# Altium PCB MainBoard_System_pcb.PcbDoc (part 1 of 3)
Units mm, origin at the board's own origin, x right, y up, seen from the top; angles counter-clockwise.
Board outline 57.35 x 57.35 mm, 2 copper layers (Top Layer, Bottom Layer); 82 components, 64 nets, 322 pads, 173 vias.
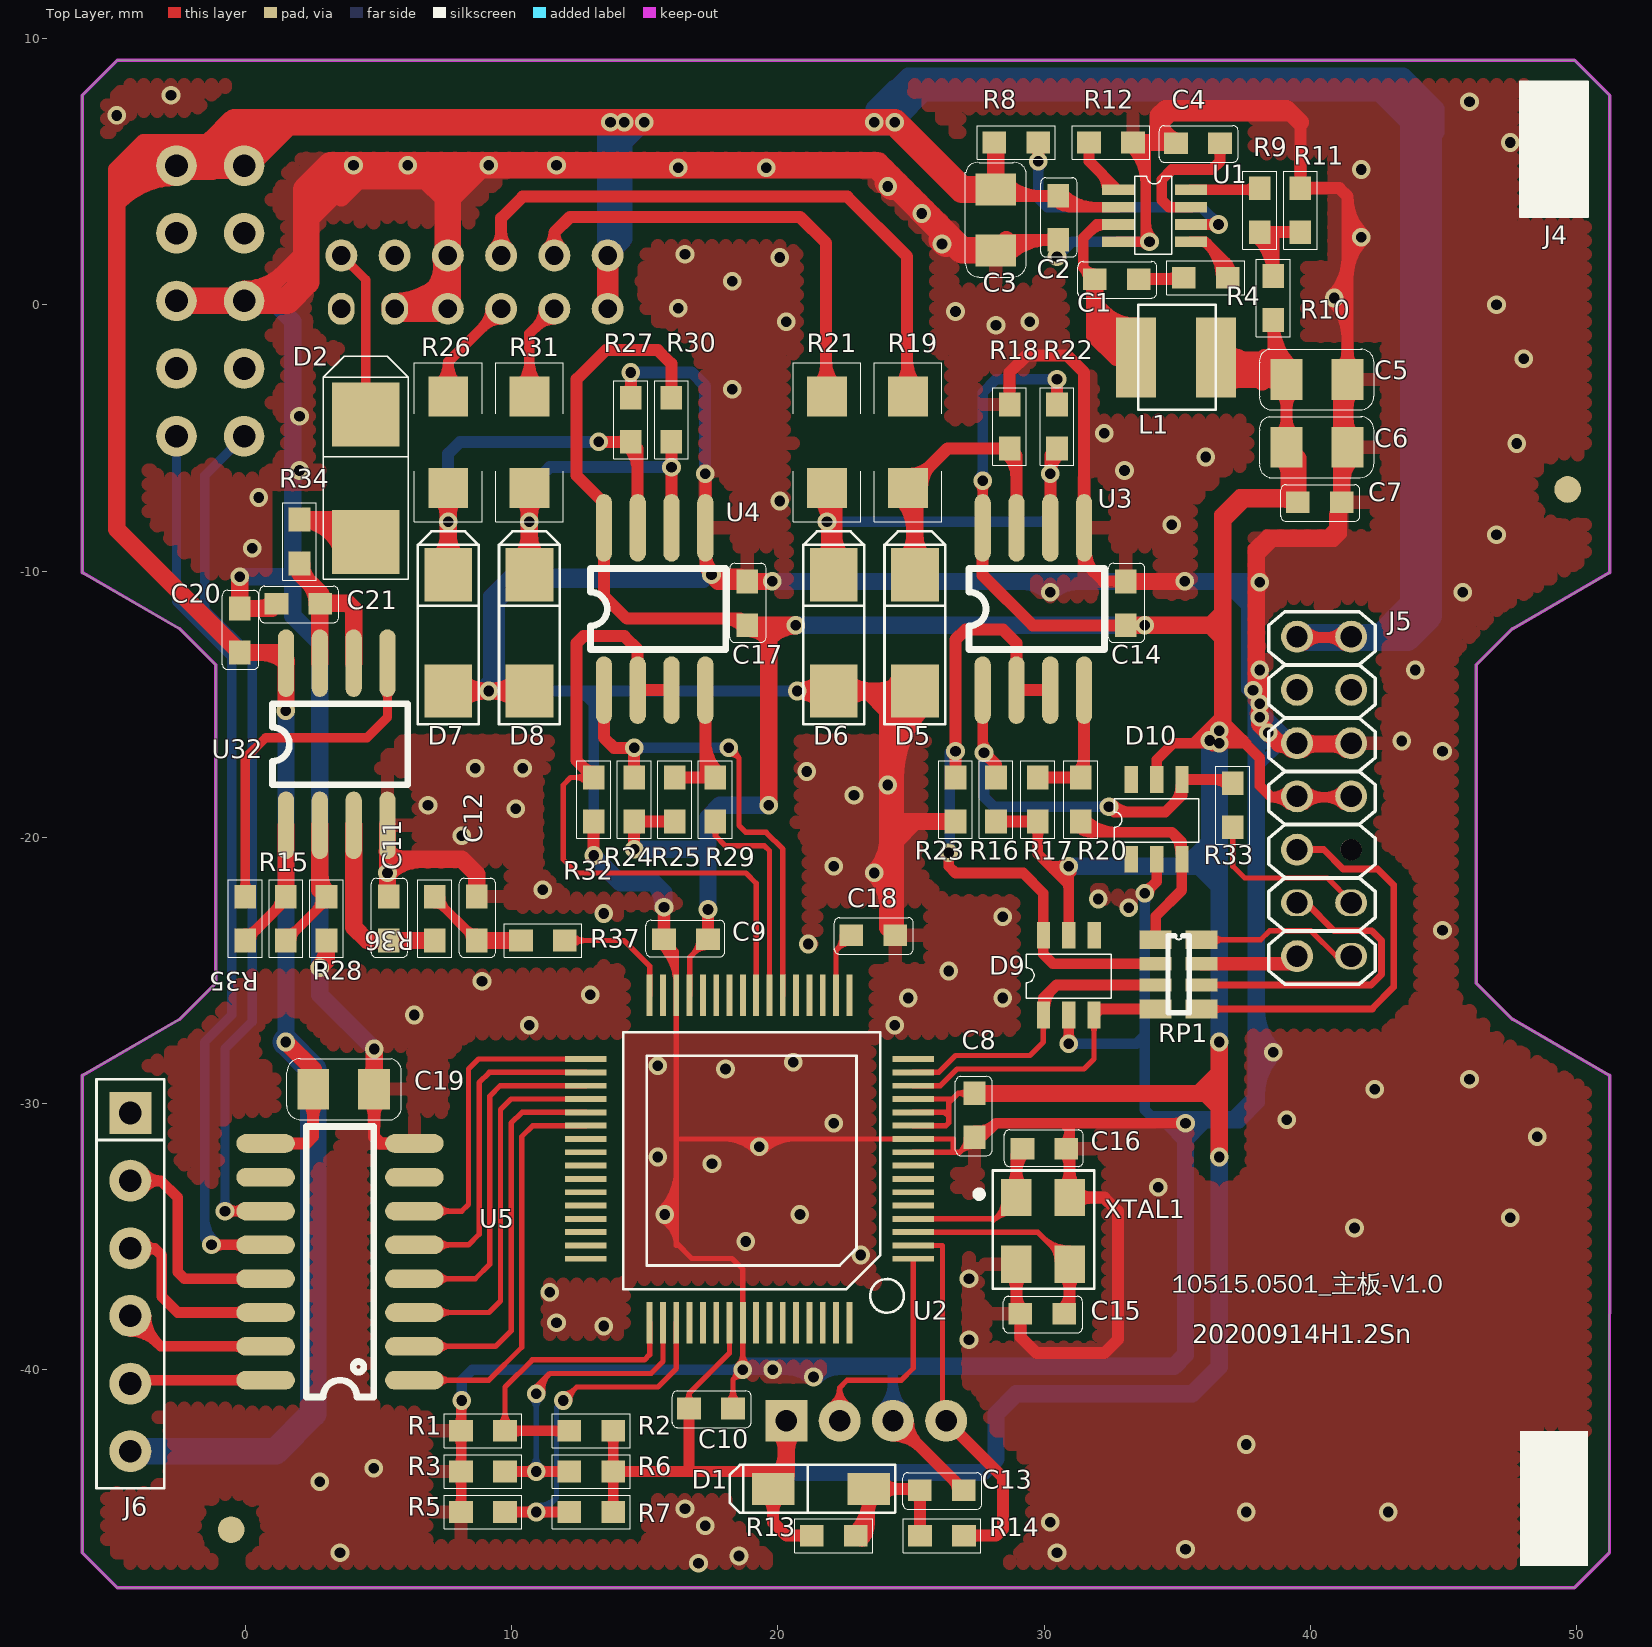
[diagram p0: Top Layer view]
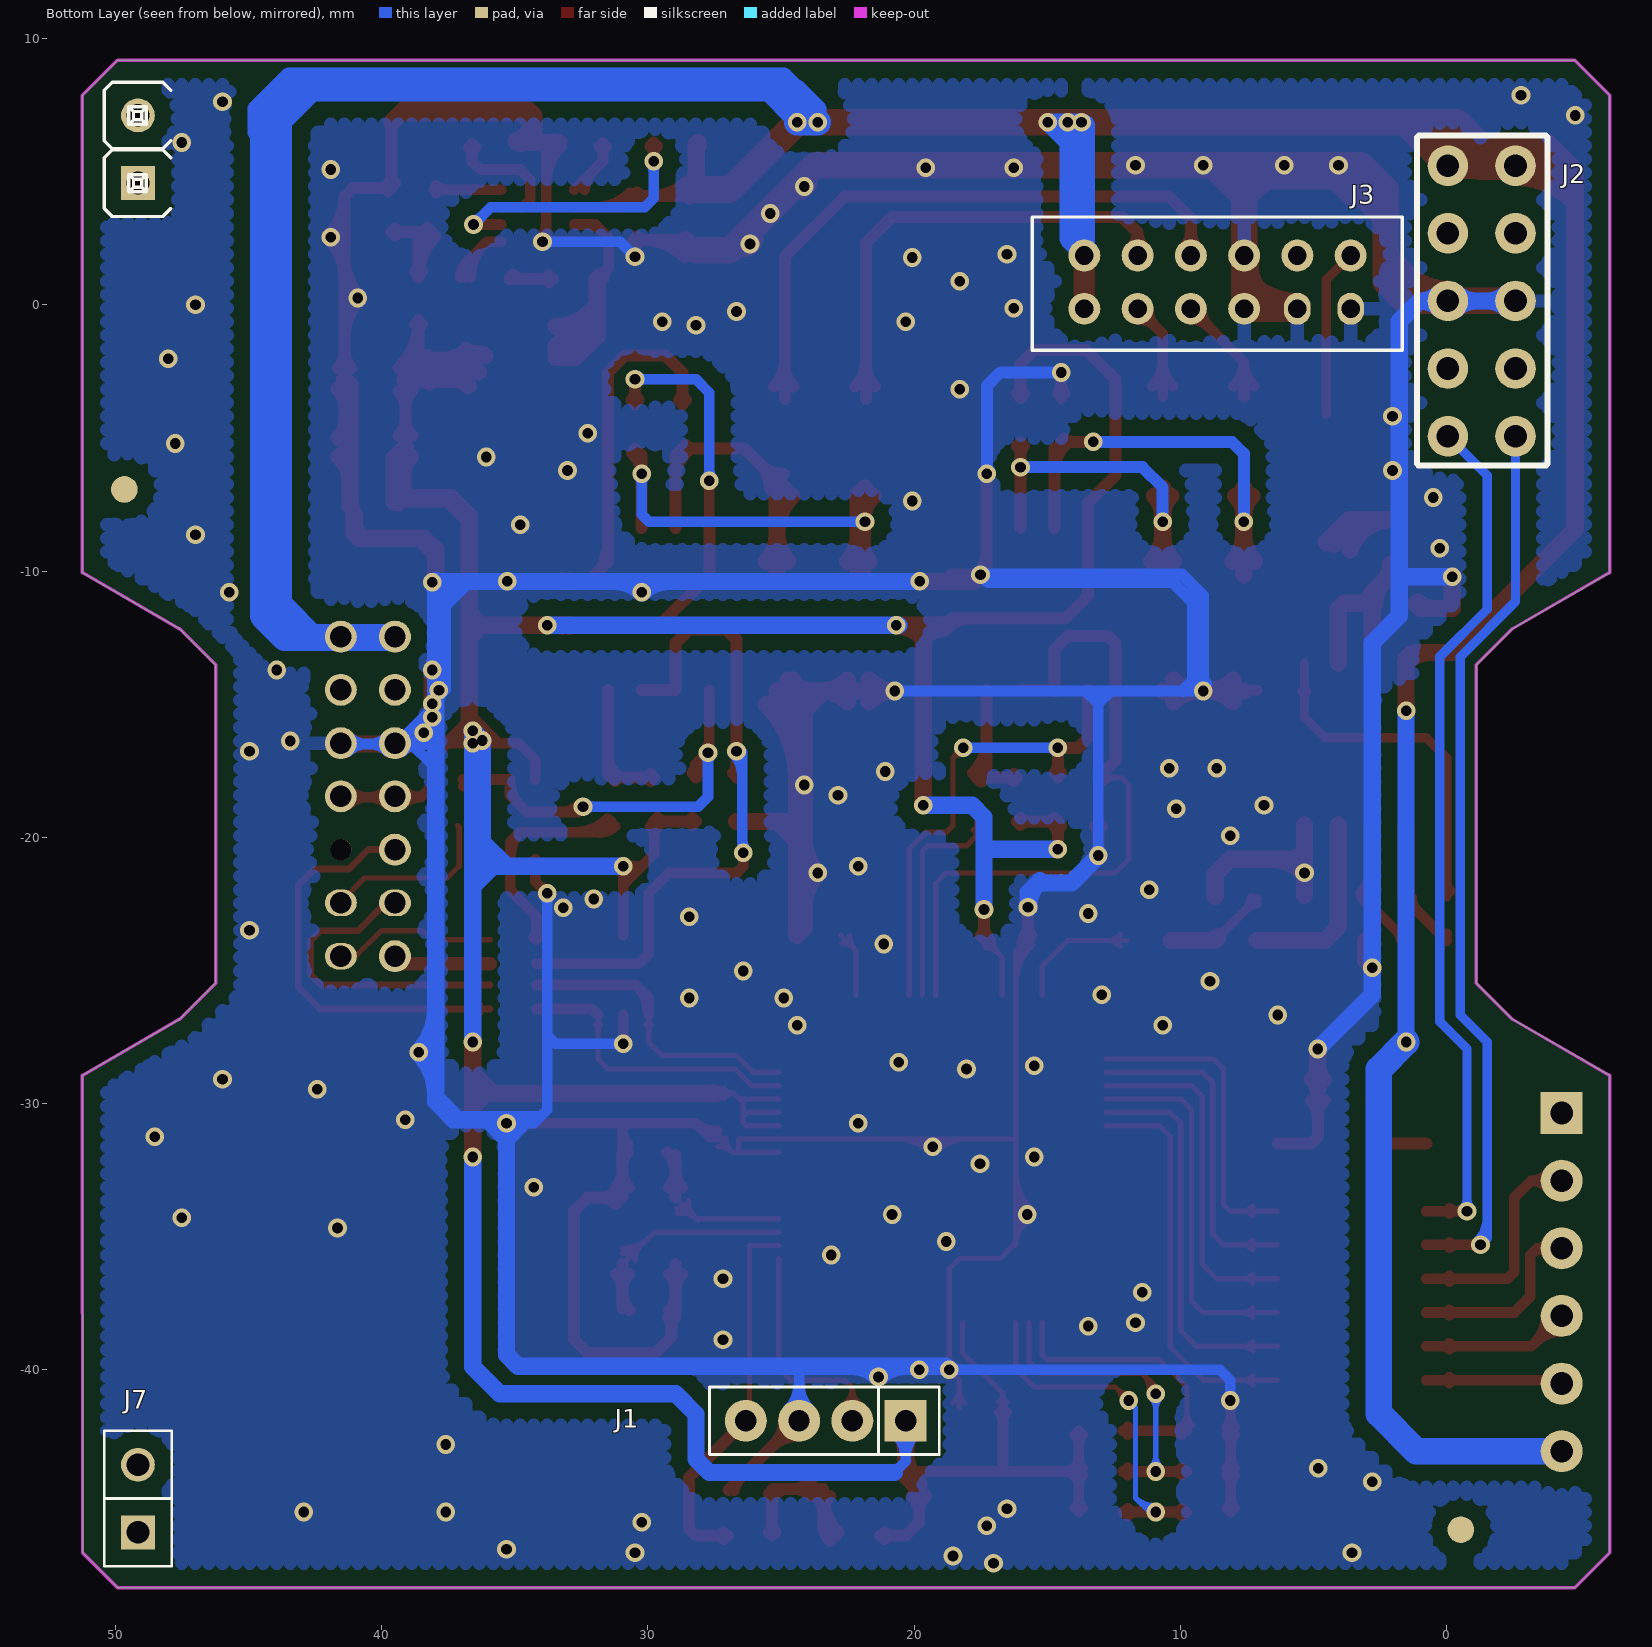
[diagram p1: Bottom Layer view, seen from below]
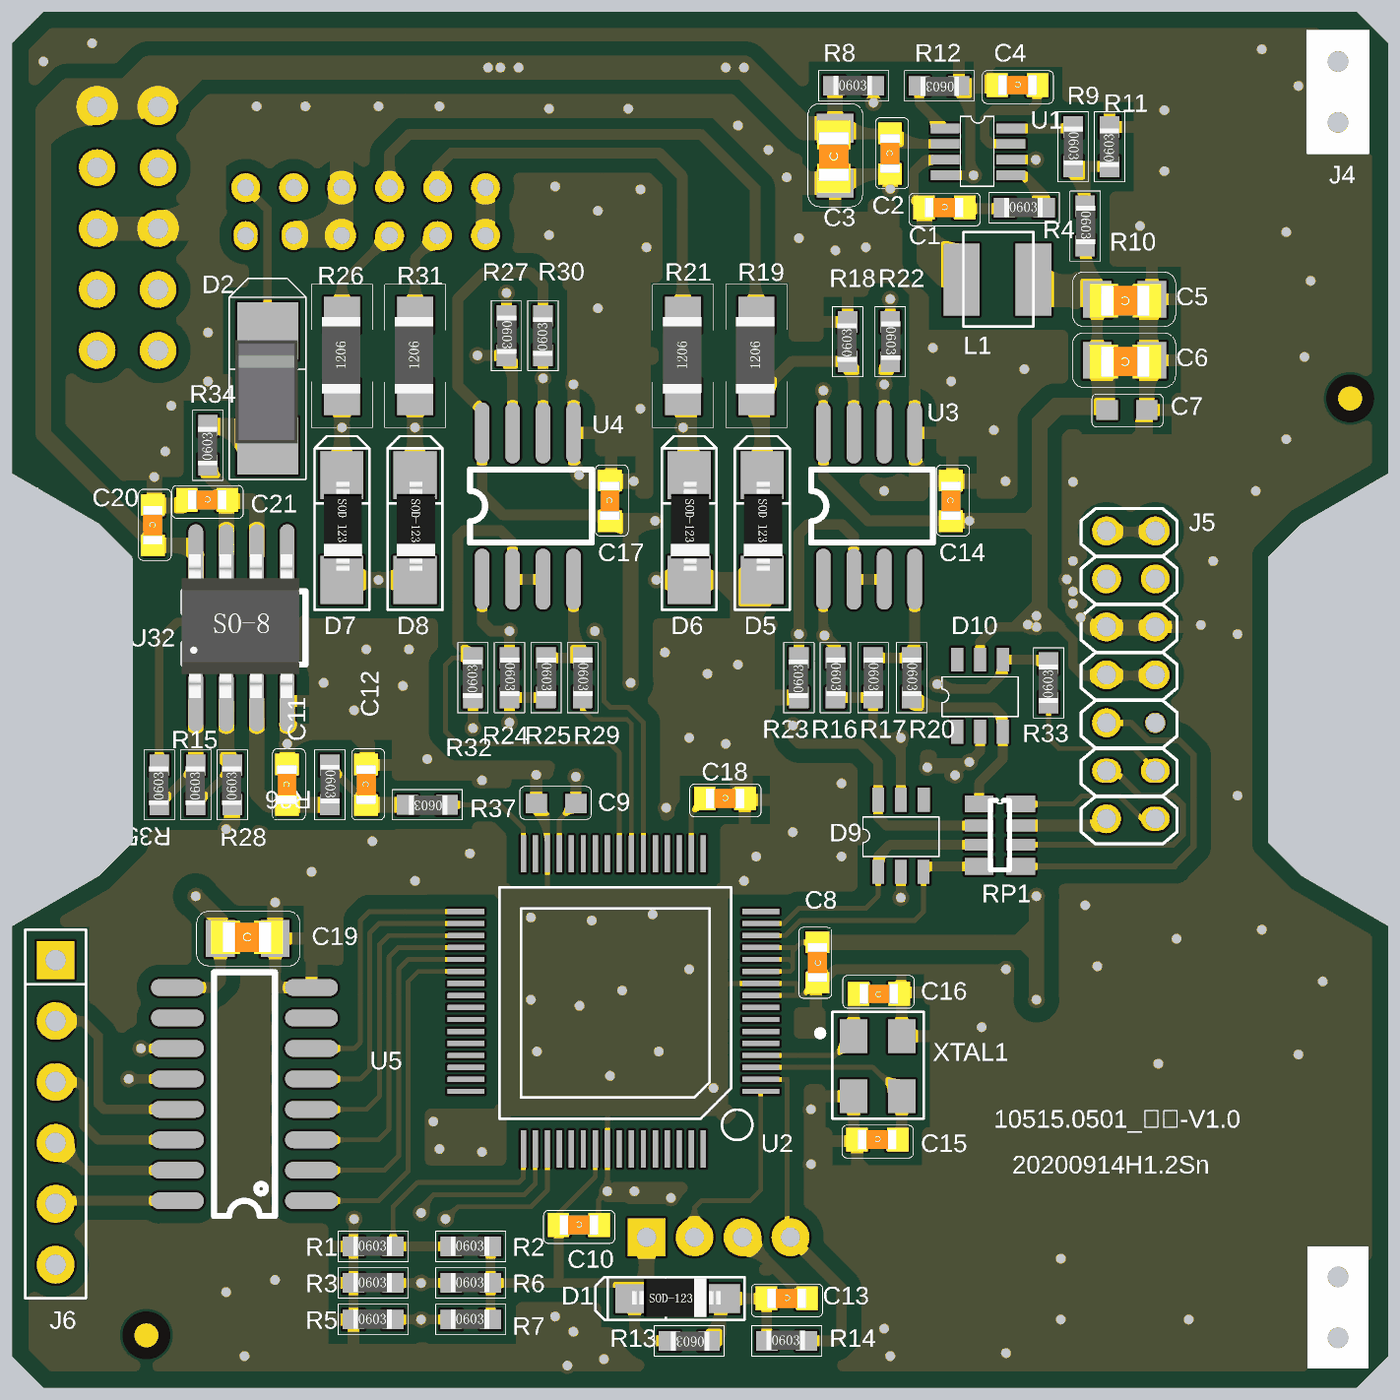
[diagram p4: 3D render of the assembled board from above, using the file's embedded part models]

## Layer stack, top to bottom
Top Layer: signal copper 0.0356
Dielectric: dielectric 0.32, FR-4, Dk 4.8
Bottom Layer: signal copper 0.0356

## Board outline
-6.118,-46.874 -4.817,-48.174 49.919,-48.174 49.919,-48.172 51.231,-46.859 51.234,-28.939 47.584,-26.831 46.234,-25.481 46.234,-13.516 47.584,-12.166 51.234,-10.059 51.234,7.862 49.919,9.177 -4.817,9.177 -6.118,7.877 -6.118,-10.059 -2.468,-12.166 -1.118,-13.516 -1.118,-25.481 -2.468,-26.831 -6.118,-28.939

## Design rules (kind name [scope] priority, off if disabled: settings)
Clearance Clearance_1 [InPolygon] p1: gap=0.6
Clearance [All] p2: gap=0.2
HoleSize [All] p1 off: absolutevalues=TRUE maxlimit=2.54 minlimit=0.025 maxpercent=80.000 minpercent=20.000
HoleToHoleClearance [All] p1 off: gap=0.254 allowstackedmicrovias=TRUE
LayerPairs [All] p1 off: enforce=TRUE
MinimumSolderMaskSliver [All] p1 off: minsoldermaskwidth=0.254
NetAntennae [All] p1 off: netantennaetolerance=0
PolygonConnect PolygonConnect_1 [IsVia] p1: connectstyle=Direct reliefconductorwidth=0.254 reliefentries=4 polygonreliefangle="90 Angle"
PolygonConnect [All] p2: connectstyle=Relief reliefconductorwidth=0.5 reliefentries=4 polygonreliefangle="90 Angle"
RoutingVias [All] p1: holewidth=0.4 width=0.7 viastyle="Through Hole" minholewidth=0.4 minwidth=0.7 maxholewidth=0.7 maxwidth=1.2
SilkToSilkClearance [All] p1 off: silktosilkclearance=0.254
SilkscreenOverComponentPads [IsPad] p1 off: minsilkscreentomaskgap=0.254
SolderMaskExpansion [All] p1: expansion=0.102
Width [All] p1: maxlimit=1 minlimit=0.2 preferedwidth=0.65
21 further rules are at their usual default settings.

## Components (designator, comment, footprint, x,y, rotation, side; value= is the part's Value field where it differs from the comment)
C1 "0.1uF/0603" CAP/SMT/0603C 33.528,1.016 r180 top
C2 "0.1uF/0603" CAP/SMT/0603C 30.48,4.064 r270 top
C3 "22uF/0805" CAP/SMT/0805C 28.194,2.032 r90 top
C4 "1nF/0603" CAP/SMT/0603C 36.576,6.119 r180 top
C5 "22uF/0805" CAP/SMT/0805C 41.402,-2.794 r180 top
C6 "22uF/0805" CAP/SMT/0805C 41.402,-5.334 r180 top
C7 "0.1uF/0603" CAP/SMT/0603C 41.148,-7.366 r180 top
C8 "0.1uF/0603" CAP/SMT/0603C 27.432,-31.242 r90 top
C9 "0.1uF/0603" CAP/SMT/0603C 15.748,-23.876 r0 top
C10 "1uF/0603" CAP/SMT/0603C 18.288,-41.402 r180 top
C11 "10uF/0603" CAP/SMT/0603C 5.334,-22.248 r270 top
C12 "10uF/0603" CAP/SMT/0603C 8.636,-22.248 r270 top
C13 "0.1uF/0603" CAP/SMT/0603C 26.954,-44.466 r180 top
C14 "0.1uF/0603" CAP/SMT/0603C 33.02,-10.414 r270 top
C15 "20pF/0603" CAP/SMT/0603C 30.734,-37.846 r180 top
C16 "20pF/0603" CAP/SMT/0603C 29.21,-31.75 r0 top
C17 "0.1uF/0603" CAP/SMT/0603C 18.796,-10.414 r270 top
C18 "0.1uF/0603" CAP/SMT/0603C 24.384,-23.622 r180 top
C19 "22uF/0805" CAP/SMT/0805C 2.54,-29.464 r0 top
C20 "0.1uF/0603" CAP/SMT/0603C -0.254,-11.43 r270 top
C21 "0.1uF/0603" CAP/SMT/0603C 2.794,-11.176 r180 top
D1 "1N4148/SOD-123" D/SMT/SOD-123 21.62,-44.466 r0 top
D2 "1N5819" D/SMT/DO-214AC 4.572,-8.89 r270 top
D5 "SMF6.5CA/SOD-123" D/SMT/SOD123 25.146,-9.906 r270 top
D6 "SMF6.5CA/SOD-123" D/SMT/SOD123 22.098,-9.906 r270 top
D7 "SMF6.5CA/SOD-123" D/SMT/SOD123 7.62,-9.906 r270 top
D8 "SMF6.5CA/SOD-123" D/SMT/SOD123 10.668,-9.906 r270 top
D9 "SR05-4B/SOT-363" TSOT-6L 29.972,-26.67 r90 top
D10 "SR05-4B/SOT-363" TSOT-6L 33.274,-20.828 r90 top
J1 "CON/DIP/1X4PIN/2MM" CON/DIP/1×4PIN/2.0MM 20.32,-41.91 r0 bottom
J2 "CON/2X5PIN" CON/DIP/2X5PIN/2.54MM -0.046,5.226 r180 bottom
J3 "CON/DIP/2X6PIN_WAFER" CON/DIP/2X6PIN/2.0MM 3.607,1.851 r270 bottom
J4 "1X2PIN_2.54MM" CON/DIP/1×2PIN/2.54MM 49.149,4.572 r180 top
J5 "CON/2X7PIN" CON/DIP/2X7PIN/2.0MM 39.497,-12.461 r0 top
J6 "1X6PIN" CON/DIP/1×6PIN/2.0MM -4.318,-30.353 r270 top
J7 "1X2PIN_2.54MM" CON/DIP/1×2PIN/2.54MM 49.149,-46.101 r0 bottom
L1 "6.8UH" L/SMT/SWPA3015S150MT 33.274,-2.032 r0 top
R1 "NC" 0603R 8.928,-42.291 r0 top
R2 "NC" 0603R 12.992,-42.291 r0 top
R3 "NC" 0603R 8.928,-43.815 r0 top
R4 "20R/0603" 0603R 36.068,1.016 r0 top
R5 "NC" 0603R 8.928,-45.339 r0 top
R6 "NC" 0603R 12.992,-43.815 r0 top
R7 "NC" 0603R 12.992,-45.339 r0 top
R8 "100K/0603" 0603R 28.956,6.096 r0 top
R9 "33K/0603" 0603R 38.1,3.556 r270 top
R10 "39K/0603" 0603R 38.608,0.254 r270 top
R11 "12K/0603" 0603R 39.624,3.556 r90 top
R12 "10K/0603" 0603R 32.512,6.096 r180 top
R13 "10K/0603" 0603R 22.098,-46.228 r180 top
R14 "430R/0603" 0603R 26.162,-46.228 r0 top
R15 "56K/0603" 0603R 1.524,-23.05 r90 top
R16 "10K/0603" 0603R 28.194,-18.58 r270 top
R17 "10K/0603" 0603R 29.76,-18.58 r270 top
R18 "10K/0603" 0603R 28.702,-4.572 r90 top
R19 "10R/5%/1206" 1206R 24.892,-6.858 r90 top
R20 "100R/0603" 0603R 31.369,-18.58 r270 top
R21 "10R/5%/1206" 1206R 21.844,-6.858 r90 top
R22 "10K/0603" 0603R 30.48,-4.572 r270 top
R23 "10K/0603" 0603R 26.67,-18.58 r90 top
R24 "10K/0603" 0603R 14.605,-18.58 r270 top
R25 "10K/0603" 0603R 16.129,-18.58 r270 top
R26 "10R/5%/1206" 1206R 7.62,-6.858 r90 top
R27 "10K/0603" 0603R 14.478,-4.318 r270 top
R28 "27K/0603" 0603R 3.048,-23.05 r90 top
R29 "100R/0603" 0603R 17.653,-18.58 r270 top
R30 "10K/0603" 0603R 16.002,-4.318 r90 top
R31 "10R/5%/1206" 1206R 10.668,-6.858 r90 top
R32 "10K/0603" 0603R 13.081,-18.58 r90 top
R33 "10R/0603" 0603R 37.084,-18.796 r90 top
R34 "1K/0603" 0603R 2.032,-8.89 r90 top
R35 "10R/0603" 0603R 0,-23.05 r90 top
R36 "1K/0603" 0603R 7.112,-23.05 r270 top
R37 "1K/0603" 0603R 11.176,-23.876 r180 top
RP1 "10R/0603/1/8W/±5%" 0603R*4 35.052,-25.146 r270 top
U1 "MPS2314/SOT23-8" TSOT-8 32.766,4.318 r0 top
U2 "STM8L052R8T6/LQFP64" LQFP64 24.892,-35.814 r180 top
U3 "MS1585" SOP-8 27.686,-14.478 r90 top
U4 "MS1585" SOP-8 13.462,-14.478 r90 top
U5 "ULN2003ADR" SOP-16 6.35,-40.386 r180 top
U32 "SGM358YS" SOIC-8 1.524,-19.558 r90 top
XTAL1 "OSC 12MHZ" OSC/SMT/12M 28.956,-33.528 r0 top

## Footprints (in the part's own frame and the unit in brackets; to place one, negate y for a bottom-side part, rotate by r counter-clockwise, add the part's x,y. Pads: shape width x height; smd on the part's side, far side on the other; paste and mask are expansions set on the pad)
0603R [mil]
  rect 35x32 smd: 1(-32.5,0) 2(32.5,0)
  silkscreen extent -58,-25 58,25, body extent -33,-15 30,16, height 18
0603R*4 [mm]
  rect 0.7x1.2 smd: 1(-1.3,-0.865) 4(1.3,-0.865) 5(1.3,0.865) 8(-1.3,0.865)
  rect 0.5x1.2 smd: 2(-0.4,-0.865) 3(0.4,-0.865) 6(0.4,0.865) 7(-0.4,0.865)
  silkscreen extent -1.45,-0.4 1.45,0.4
1206R [mm]
  rect 1.5x1.5 smd: 1(-0.02,0) 2(3.409,0)
  silkscreen extent -1.29,-1.27 4.68,1.27, body extent 0.13,-0.76 3.33,0.84, height 0.6
CAP/SMT/0603C [mil]
  rect 35x32 smd: 1(-1,1.97) 2(64,1.97)
  silkscreen extent -28,-24 89,30, body extent -20,-20 82,19, height 35
CAP/SMT/0805C [mm]
  rect 1.2x1.524 smd: 1(0.01,0.01) 2(2.296,0.01)
  silkscreen extent -0.99,-1.13 3.32,1.15, body extent -0.38,-0.64 2.62,0.76, height 0.93
CON/DIP/1×2PIN/2.54MM [mm]
  rect 1.27x1.27 hole 0.85: 1(0,0)
  round 1.27 hole 0.85: 2(0,-2.54)
  silkscreen extent -1.27,-3.81 1.27,1.27
CON/DIP/1×4PIN/2.0MM [mil]
  rect 62x62 hole 31.5 mask+4: 1(0,0)
  round 62 hole 31.5 mask+4: 2(78.74,0) 3(157.48,0) 4(236.22,0)
  silkscreen extent -50,-50 290,50
CON/DIP/1×6PIN/2.0MM [mil]
  rect 62x62 hole 33.46 mask+4: 1(0,0)
  round 62 hole 33.46 mask+4: 2(100,0) 3(200,0) 4(300,0) 5(400,0) 6(500,0)
  silkscreen extent -50,-50 555,50
CON/DIP/2X5PIN/2.54MM [mil]
  round 60 hole 33.46: 1(0,0) 2(100,0) 3(0,-100) 4(100,-100) 5(0,-200) 6(100,-200) 7(0,-300) 8(100,-300) 9(0,-400) 10(100,-400)
  silkscreen extent -48,-446 149,47
CON/DIP/2X6PIN/2.0MM [mm]
  round 1.2 hole 0.7: 1(0,0) 3(0,-2) 5(0,-4) 6(2,-4) 7(0,-6) 8(2,-6) 9(0,-8) 10(2,-8) 11(0,-10) 12(2,-10)
  oval 1.2x1 hole 0.7: 2(2,0) 4(2,-2)
  silkscreen extent -1.45,-11.96 3.55,1.94
CON/DIP/2X7PIN/2.0MM [mm]
  round 1.2 hole 0.8: 1(0,0) 2(2.032,0) 3(0,-2) 4(2.032,-2) 5(0,-4) 6(2.032,-4) 7(0,-6) 8(2.032,-6) 9(0,-8) 13(0,-12)
  round 0.8 hole 0.8: 10(2.032,-8)
  oval 1.2x1 hole 0.8: 11(0,-10) 12(2.032,-10) 14(2.032,-12)
  silkscreen extent -1.06,-13.05 2.94,0.93
D/SMT/DO-214AC [mil]
  rect 94.49x100 smd: 1(-187.98,-2) 2(1,-2)
  silkscreen extent -274,-65 56,61, body extent -190,-55 15,47, height 40
D/SMT/SOD123 [mm]
  rect 2x1.8 smd: 1(0.229,0) 2(4.597,0)
  silkscreen extent -1.4,-1.14 5.84,1.14, body extent 0.51,-0.76 4.21,0.84, height 1.2
D/SMT/SOD-123 [mm]
  rect 1.6x1.2 smd: 1(-1.8,0) 2(1.8,0)
  silkscreen extent -3.43,-0.9 2.78,0.9, body extent -1.91,-0.76 1.79,0.84, height 1.2
L/SMT/SWPA3015S150MT [mm]
  rect 1.5x3 smd: 1(0.175,0.051) 2(3.175,0.051)
  silkscreen extent 0.25,-1.91 3.17,2.03
LQFP64 [mm]
  rect 1.55x0.22 smd: 1(-0.193,0.013) 2(-0.193,-0.487) 3(-0.193,-0.987) 4(-0.193,-1.487) 5(-0.193,-1.987) 6(-0.193,-2.487) 7(-0.193,-2.987) 8(-0.193,-3.487) 9(-0.193,-3.987) 10(-0.193,-4.487) 11(-0.193,-4.987) 12(-0.193,-5.487) 13(-0.193,-5.987) 14(-0.193,-6.487) 15(-0.193,-6.987) 16(-0.193,-7.487) 33(12.107,-7.487) 34(12.107,-6.987) 35(12.107,-6.487) 36(12.107,-5.987) 37(12.107,-5.487) 38(12.107,-4.987) 39(12.107,-4.487) 40(12.107,-3.987) 41(12.107,-3.487) 42(12.107,-2.987) 43(12.107,-2.487) 44(12.107,-1.987) 45(12.107,-1.487) 46(12.107,-0.987) 47(12.107,-0.487) 48(12.107,0.013)
  rect 0.22x1.55 smd: 17(2.207,-9.887) 18(2.707,-9.887) 19(3.207,-9.887) 20(3.707,-9.887) 21(4.207,-9.887) 22(4.707,-9.887) 23(5.207,-9.887) 24(5.707,-9.887) 25(6.207,-9.887) 26(6.707,-9.887) 27(7.207,-9.887) 28(7.707,-9.887) 29(8.207,-9.887) 30(8.707,-9.887) 31(9.207,-9.887) 32(9.707,-9.887) 49(9.707,2.413) 50(9.207,2.413) 51(8.707,2.413) 52(8.207,2.413) 53(7.707,2.413) 54(7.207,2.413) 55(6.707,2.413) 56(6.207,2.413) 57(5.707,2.413) 58(5.207,2.413) 59(4.707,2.413) 60(4.207,2.413) 61(3.707,2.413) 62(3.207,2.413) 63(2.707,2.413) 64(2.207,2.413)
  silkscreen extent 0.16,-8.5 10.7,2.04
OSC/SMT/12M [mm]
  rect 1.15x1.4 smd: 1(0,0) 2(0,-2.5) 3(2,-2.5) 4(2,0)
  silkscreen extent -1.52,-3.43 2.92,1.02
SOIC-8 [mil]
  oval 100x24 smd: 1(0.27,-0.17) 2(0.27,-50.17) 3(0.27,-100.17) 4(0.27,-150.17) 5(240.27,-150.17) 6(240.27,-100.17) 7(240.27,-50.17) 8(240.27,-0.17)
  silkscreen extent 60,-180 180,20, body extent 5,-170 241,23, height 67
SOP-8 [mil]
  oval 100x24 smd: 1(0.27,-0.17) 2(0.27,-50.17) 3(0.27,-100.17) 4(0.27,-150.17) 5(240.27,-150.17) 6(240.27,-100.17) 7(240.27,-50.17) 8(240.27,-0.17)
  silkscreen extent 60,-180 180,20
SOP-16 [mm]
  oval 2.2x0.7 smd: 1(0,0) 2(0,-1.27) 3(0,-2.54) 4(0,-3.81) 5(0,-5.08) 6(0,-6.35) 7(0,-7.62) 8(0,-8.89) 9(5.588,-8.89) 10(5.588,-7.62) 11(5.588,-6.35) 12(5.588,-5.08) 13(5.588,-3.81) 14(5.588,-2.54) 15(5.588,-1.27) 16(5.588,0)
  silkscreen extent 1.52,-9.53 4.06,0.64
TSOT-6L [mm]
  rect 1x0.5 smd: 1(0,0) 2(0,-0.95) 3(0,-1.9) 4(3,-1.905) 5(3,-0.95) 6(3,0)
  silkscreen extent 0.64,-2.54 2.29,0.64
TSOT-8 [mm]
  rect 1.2x0.4 smd: 1(0,0) 2(0,-0.65) 3(0,-1.3) 4(0,-1.95) 5(2.746,-1.95) 6(2.746,-1.3) 7(2.746,-0.65) 8(2.746,0)
  silkscreen extent 0.64,-2.41 2.03,0.51

## Part data
C1 C2 C4 C7 C8 C9 C10 C11 C12 C13 C14 C15 C16 C17 C18 C20 C21: library part CAP/CAP/SMT/0603C
C3 C5 C6 C19: library part CAP/CAP/SMT/0805C
D1: library part D/D/SMT/1N4148/SOD-123, "VR=75V T(-65-175)P(0.5W)VF=0.6V"
D2: library part D/D/SMT/1N5819/DO-214
D5 D6 D7 D8: library part D/TVS/SMT/SMF13CA/SOD-123
D9 D10: library part D/TVS/SMT/SR05-4B/SOT-363
J1 J3: "Connector"
J2: library part CON/DIP/2X5PIN, "Connector"
J4 J7: library part CON/DIP/1X2PIN_2.54MM, "Connector"
J5: library part CON/DIP/2X7PIN
J6: library part CON/DIP/1X6PIN_2MM, "Connector"
L1: library part L/L/SMT/SWPA3015S150MT, "电感3.0MM*3.0MM*1.5MM"
R1 R2 R3 R4 R5 R6 R7 R8 R9 R10 R11 R12 R13 R14 R15 R28 R33 R34 R35 R36 R37: library part RES/RES/SMT/0603
R16 R17 R18 R20 R22 R23 R24 R25 R27 R29 R30 R32: library part Res1, "Resistor"
R19 R21 R26 R31: library part RES/RES/SMT/1206
RP1: library part "RES /PACKS/SMT/0603*4", "Isolated Resistor Network"
U1: library part IC/POWER/SMT/MPS2314/SOT23-8
U2: library part MCU/SMT/STM8L052R8T6/LQFP64
U3 U4: library part MAX487
U5: library part IC/DRIVE/SMT/ULN2003ADR/SOIC-16, "High-Voltage, High-Current Darlington Array"
U32: library part IC/OP/SMT/SGM358YS/SOIC-8, "1MHz 60uA Rail-to-Rail i/o CMOS OP"
XTAL1: library part XTAL/SMT/OSC12MHZ-2

## Free pads (board coordinates)
  round 2 on Top Solder: 0(-0.533,-45.999) 0(49.657,-6.934)
  round 1 all layers, no hole: 0(-0.533,-45.999) 0(49.657,-6.934)
  round 2 on Bottom Solder: 0(-0.533,-45.999) 0(49.657,-6.934)

## Via types
v1: diameter 0.7, hole 0.4, Top Layer to Bottom Layer, tented both sides, 173 vias

## Nets (pads, with @x,y where several pads share a name; then routed paths per layer and width w, separated by ;. In a path a pad name is that pad's centre, name@x,y a point inside that pad or via, vN(x,y) a via of type N, cw(c..) or ccw(c..) an arc to the next point about the centre after c; other vN are vias at no path point)
+3.3V: C5.2 C6.2 C7.2 C8.2 C9.2 C10.2 C14.2 C17.2 D1.1 D9.5 D10.5 J1.1 J5.7 J5.8 L1.2 R2.2 R6.2 R7.2 R10.2 R13.2 R16.2 R17.2 R22.1 R24.2 R25.2 R30.2 U2.11 U2.12 U2.13 U2.29 U2.55 U3.8 U4.8 | length 410.1
  Top Layer w0.2: C10.2@16.498,-41.194 ccw(c16.307,-40.894) 16.662,-40.894 ; C10.2@16.662,-41.452 16.662,-40.894 ; U2.29@16.685,-25.927 16.685,-24.515 C9.2@17.374,-23.826 ; 16.786,-24.414 ccw(c16.197,-23.826) C9.2@17.029,-23.826 ; C10.2@16.827,-41.194 cw(c17.018,-40.894) 16.662,-40.894 ; 16.877,-24.322 cw(c17.335,-24.78) C9.2@17.335,-24.132 ; U2.55@18.185,-38.227 18.185,-39.371 16.662,-40.894 ; U2.11@25.085,-30.827 26.316,-30.827 26.416,-30.727 26.416,-30.48 ; U2.12@25.085,-30.327 26.263,-30.327 26.416,-30.48 ; U2.13@25.085,-29.827 26.561,-29.827 ; C8.2@27.136,-29.799 ccw(c26.772,-30.071) 26.772,-29.616 ; C8.2@27.136,-29.433 cw(c26.772,-29.162) 26.772,-29.616 ; C8.2@27.382,-29.616 26.772,-29.616 ; 26.416,-30.48 26.416,-29.972 26.561,-29.827 ; 26.561,-29.827 26.772,-29.616
  Top Layer w0.4: R7.2@13.672,-45.193 ccw(c13.319,-44.841) 13.818,-44.841 ccw(c14.316,-44.841) R7.2@13.963,-45.193 ; R6.2@13.672,-43.961 cw(c13.319,-44.313) 13.818,-44.313 cw(c14.316,-44.313) R6.2@13.963,-43.961 ; R6.2@13.672,-43.669 ccw(c13.319,-43.317) 13.818,-43.317 ccw(c14.316,-43.317) R6.2@13.963,-43.669 ; R2.2@13.672,-42.437 cw(c13.319,-42.789) 13.818,-42.789 cw(c14.316,-42.789) R2.2@13.963,-42.437 ; R7.2@13.818,-45.339 R6.2@13.818,-43.815 ; R2.2@13.818,-42.291 R6.2@13.818,-43.815 ; R6.2@14.002,-43.961 cw(c14.354,-44.313) 14.354,-43.815 cw(c14.354,-43.317) R6.2@14.002,-43.669 ; C10.2@16.516,-41.598 cw(c16.164,-41.95) 16.662,-41.95 cw(c17.161,-41.95) C10.2@16.808,-41.598 ; C10.2@16.662,-41.452 16.662,-43.18 16.662,-43.815 ; C17.2@18.846,-12.284 cw(c18.846,-13.244) 19.525,-12.565 ; C17.2@18.846,-12.04 18.999,-12.04 19.66,-12.7 ; v1@19.554,-18.69 ccw(c19.297,-18.434) 19.66,-18.434 ccw(c20.022,-18.434) v1@19.766,-18.69 ; v1(19.66,-18.796) 19.66,-17.018 19.66,-12.7 ; 19.66,-12.04 19.66,-12.7 ; D1.1@19.737,-44.183 ccw(c18.33,-42.776) 20.32,-42.776 ; 19.812,-12.547 cw(c20.676,-13.41) v1@20.676,-12.19 ; D1.1@19.82,-44.466 20.32,-43.966 J1.1@20.32,-41.91 ; J1.1@19.905,-42.325 cw(c18.902,-43.328) 20.32,-43.328 cw(c21.738,-43.328) J1.1@20.735,-42.325 ; D1.1@20.02,-44.466 ccw(c19.296,-43.742) 20.32,-43.742 ; 20.116,-12.04 20.32,-12.04 ; 20.142,-12.217 cw(c20.401,-12.476) v1@20.596,-12.167 ; 20.169,-43.815 16.662,-43.815 ; v1@20.57,-12.146 ccw(c20.313,-12.402) 20.313,-12.04 ccw(c20.313,-11.677) v1@20.57,-11.934 ; v1(20.676,-12.04) 20.32,-12.04 ; C8.2@27.382,-29.616 35.814,-29.616 ; C8.2@27.528,-29.762 cw(c27.88,-30.115) 27.88,-29.616 cw(c27.88,-29.118) C8.2@27.528,-29.47 ; v1@27.584,-6.714 cw(c27.328,-6.97) 27.69,-6.97 cw(c28.052,-6.97) v1@27.796,-6.714 ; U3.8@27.69,-8.375 v1(27.69,-6.608) ; R17.2@29.614,-19.59 cw(c29.262,-19.942) 29.76,-19.942 cw(c30.259,-19.942) R17.2@29.906,-19.59 ; R17.2@29.76,-19.406 29.76,-20.616 30.226,-21.082 ; 30.319,-21.175 ccw(c30.771,-20.724) v1@31.019,-21.312 ; v1@30.816,-20.976 cw(c30.56,-20.72) 30.56,-21.082 cw(c30.56,-21.444) 30.816,-21.188 cw(c30.56,-21.444) 30.922,-21.444 cw(c31.284,-21.444) v1@31.028,-21.188 ; 30.901,-21.844 30.901,-21.757 30.226,-21.082 ; D9.5@30.922,-23.67 v1(30.922,-21.082) 30.226,-21.082 ; v1@33.578,-12.04 v1(33.782,-12.04) 36.068,-12.04 ; v1@33.888,-12.146 cw(c34.144,-12.402) 34.144,-12.04 cw(c34.144,-11.677) v1@33.888,-11.934 ; D10.5@34.224,-17.828 34.224,-17.084 34.847,-16.461 35.609,-16.461 ; 35.618,-16.461 ccw(c35.618,-15.768) v1@36.108,-16.258 ; 35.83,-16.24 cw(c36.154,-16.564) v1@36.285,-16.124 ; 35.916,-29.616 35.814,-29.616 ; v1@35.973,-16.431 cw(c36.42,-16.306) 36.092,-15.978 ; 36.136,-15.934 cw(c36.576,-16.375) v1@36.576,-15.752 ; v1@36.141,-16.233 ccw(c35.731,-15.494) 36.576,-15.494 ; v1@36.213,-16.316 cw(c36.505,-16.608) v1@36.684,-16.236 ; v1@36.236,-16.293 cw(c36.576,-16.632) 36.576,-16.152 cw(c36.576,-17.127) 37.266,-16.438 ; v1@36.32,-16.258 ccw(c36.81,-15.768) v1@36.81,-16.461 ; v1@36.329,-16.041 ccw(c36.821,-15.963) v1@36.821,-16.461 ; v1@36.335,-16.583 ccw(c36.108,-16.174) v1@36.576,-16.174 ; v1@36.358,-16.324 cw(c37.177,-16.095) 36.576,-15.494 ; v1@36.364,-16.364 cw(c36.844,-16.364) v1@36.505,-16.024 ; v1@36.47,-31.898 ccw(c36.214,-31.642) 36.576,-31.642 ccw(c36.938,-31.642) v1@36.682,-31.898 ; v1@36.47,-27.792 cw(c36.214,-28.048) 36.576,-28.048 cw(c36.938,-28.048) v1@36.682,-27.792 ; v1@36.487,-16.228 cw(c36.729,-16.862) 37.21,-16.382 ; v1@36.495,-16.335 ccw(c36.096,-15.719) 36.83,-15.719 ; v1@36.557,-16.312 ccw(c36.517,-16.002) v1@36.83,-16.002 ; v1@36.569,-15.752 cw(c36.587,-16.418) 37.058,-15.947 ; v1(36.576,-32.004) 36.576,-30.124 36.576,-29.616 ; v1(36.576,-27.686) 36.576,-28.854 36.576,-29.616 ; v1@36.682,-16.567 cw(c36.938,-16.823) 36.938,-16.461 cw(c36.938,-16.099) v1@36.682,-16.355 ; v1@36.724,-15.979 ccw(c37.289,-15.889) 37.289,-16.461 ; 36.83,-15.027 cw(c35.601,-15.027) v1@36.47,-15.896 ; 38.252,-7.112 cw(c38.252,-8.648) 39.338,-7.562 ccw(c38.986,-7.914) 38.986,-7.416 ccw(c38.986,-6.918) C7.2@39.338,-7.27 ; J5.7@39.214,-18.776 ccw(c38.531,-19.459) 38.531,-18.493 ; J5.7@39.214,-18.21 cw(c38.531,-17.527) 38.531,-18.493 ; C7.2@39.218,-7.112 37.338,-7.112 37.034,-7.416 ; J5.7@39.497,-18.493 J5.8@41.529,-18.493 ; C7.2@39.522,-7.416 37.542,-7.416 ; J5.7@39.78,-18.776 cw(c40.463,-19.459) 40.463,-18.493 cw(c40.463,-17.527) J5.7@39.78,-18.21 ; J5.8@41.246,-18.776 ccw(c40.563,-19.459) 40.563,-18.493 ccw(c40.563,-17.527) J5.8@41.246,-18.21 ; R6.2@13.818,-43.815 16.662,-43.815 ; 19.66,-12.7 20.32,-12.04 ; 20.32,-12.04 ccw(c20.32,-11.693) 20.568,-11.935 cw(c20.32,-11.693) 20.32,-12.04 ; 20.32,-12.04 cw(c20.32,-12.386) 20.568,-12.144 ccw(c20.32,-12.386) 20.32,-12.04 ; v1@33.568,-12.04 ccw(c33.568,-12.538) 33.216,-12.186 cw(c33.568,-12.538) v1@33.568,-12.04 ; v1@33.568,-12.04 cw(c33.568,-11.541) 33.216,-11.894 ccw(c33.568,-11.541) v1@33.568,-12.04 ; 35.609,-16.461 36.576,-15.494 ; 35.609,-16.461 v1@36.068,-16.461 ; 35.814,-29.616 36.068,-29.616 36.576,-29.616 ; v1@36.068,-16.461 36.527,-16.002 v1(36.576,-16.002) ; v1@36.068,-16.461 v1(36.576,-16.461) ; 36.068,-12.04 36.474,-12.446 36.576,-12.446 ; 36.068,-12.04 36.576,-12.04 ; 36.068,-12.04 36.576,-11.532 ; v1@36.214,-16.461 ccw(c36.214,-16.099) v1@36.47,-16.355 ; v1@36.214,-16.461 cw(c36.214,-16.823) v1@36.47,-16.567 ; v1@36.214,-16.461 ccw(c36.214,-16.099) v1@36.47,-16.355 ; v1@36.214,-16.461 cw(c36.214,-16.823) v1@36.47,-16.567 ; v1@36.214,-16.461 ccw(c36.214,-16.099) v1@36.47,-16.355 ; v1@36.214,-16.461 cw(c36.214,-16.823) v1@36.47,-16.567 ; v1@36.47,-16.355 ccw(c36.214,-16.099) v1@36.576,-16.099 ; v1@36.47,-16.355 ccw(c36.214,-16.099) v1@36.576,-16.099 ; v1@36.47,-16.355 ccw(c36.214,-16.099) v1@36.576,-16.099 ; v1@36.47,-16.108 cw(c36.214,-16.364) v1@36.576,-16.364 ; v1@36.47,-16.108 cw(c36.214,-16.364) v1@36.576,-16.364 ; v1@36.47,-16.108 cw(c36.214,-16.364) v1@36.576,-16.364 ; v1@36.47,-15.896 ccw(c36.214,-15.64) 36.576,-15.64 ; v1@36.47,-15.896 ccw(c36.214,-15.64) 36.576,-15.64 ; v1@36.47,-15.896 ccw(c36.214,-15.64) 36.576,-15.64 ; v1(36.576,-16.461) cw(c36.576,-16.222) 36.354,-16.309 ccw(c36.576,-16.222) v1(36.576,-16.461) ; v1(36.576,-16.461) v1(36.576,-16.002) ; v1(36.576,-16.461) 37.289,-16.461 ; v1@36.576,-16.364 cw(c36.938,-16.364) v1@36.682,-16.108 ; v1@36.576,-16.364 cw(c36.938,-16.364) v1@36.682,-16.108 ; v1@36.576,-16.364 cw(c36.938,-16.364) v1@36.682,-16.108 ; v1@36.576,-16.099 ccw(c36.938,-16.099) v1@36.682,-16.355 ; v1@36.576,-16.099 ccw(c36.938,-16.099) v1@36.682,-16.355 ; v1@36.576,-16.099 ccw(c36.938,-16.099) v1@36.682,-16.355 ; v1(36.576,-16.002) 36.576,-15.494 ; 36.576,-15.64 ccw(c36.938,-15.64) v1@36.682,-15.896 ; 36.576,-15.64 ccw(c36.938,-15.64) v1@36.682,-15.896 ; 36.576,-15.64 ccw(c36.938,-15.64) v1@36.682,-15.896 ; 36.576,-15.494 36.576,-12.446 ; 36.576,-12.446 36.576,-12.04 ; 36.576,-12.04 36.576,-11.532 ; 36.576,-11.532 36.576,-8.382 ; 36.576,-8.382 36.83,-8.128 ; 36.576,-8.382 36.576,-7.874 37.034,-7.416 ; v1@36.83,-16.002 37.289,-16.461 ; v1@36.83,-16.002 36.83,-15.719 ; 36.83,-15.719 37.447,-16.336 37.467,-16.336 37.592,-16.461 ; 36.83,-15.719 36.83,-8.128 ; 36.83,-8.128 37.542,-7.416 ; 37.034,-7.416 37.542,-7.416 ; 37.289,-16.461 37.592,-16.461 ; 37.592,-16.461 37.543,-16.461 38.1,-17.018 38.1,-18.062 38.531,-18.493
  Top Layer w0.45: R24.2@14.477,-19.572 cw(c14.167,-19.882) 14.605,-19.882 cw(c15.043,-19.882) R24.2@14.733,-19.572 ; v1(14.605,-20.447) R24.2@14.605,-19.406 R25.2@16.129,-19.406 ; R24.2@14.733,-19.534 cw(c15.043,-19.843) 15.043,-19.406 cw(c15.043,-18.968) R24.2@14.733,-19.277 ; R30.2@15.874,-3.326 ccw(c15.564,-3.016) 16.002,-3.016 ccw(c16.44,-3.016) R30.2@16.13,-3.326 ; R25.2@16.001,-19.534 ccw(c15.691,-19.843) 15.691,-19.406 ccw(c15.691,-18.968) R25.2@16.001,-19.277 ; R30.2@16.002,-3.492 16.002,-2.209 15.494,-1.701 13.539,-1.701 12.446,-2.794 12.446,-6.413 13.466,-7.433 13.466,-10.926 14.326,-11.786 18.592,-11.786 C17.2@18.846,-12.04 19.66,-12.04 20.32,-12.04 ; C9.2@17.245,-23.698 ccw(c16.936,-23.388) 17.374,-23.388 ccw(c17.812,-23.388) C9.2@17.502,-23.698 ; C9.2@17.374,-23.826 v1(17.374,-22.708) ; 17.887,-11.786 cw(c17.887,-12.961) C17.2@18.718,-12.13 ; C17.2@18.974,-12.168 cw(c19.284,-12.478) 19.284,-12.04 cw(c19.284,-11.602) C17.2@18.974,-11.911 ; D1.1@19.555,-44.731 cw(c18.915,-45.371) 19.82,-45.371 cw(c20.725,-45.371) D1.1@20.085,-44.731 ; D1.1@19.82,-44.466 19.82,-45.728 20.32,-46.228 R13.2@21.273,-46.228 ; D1.1@20.32,-43.966 20.32,-43.815 ; R13.2@21.106,-46.356 ccw(c20.796,-46.666) 20.796,-46.228 ccw(c20.796,-45.79) R13.2@21.106,-46.1 ; U3.8@27.69,-8.375 27.69,-10.164 29.566,-12.04 v1@33.578,-12.04 ; R16.2@28.194,-19.406 R17.2@29.76,-19.406 ; R16.2@28.322,-19.534 cw(c28.632,-19.843) 28.632,-19.406 cw(c28.632,-18.968) R16.2@28.322,-19.277 ; R17.2@29.632,-19.534 ccw(c29.322,-19.843) 29.322,-19.406 ccw(c29.322,-18.968) R17.2@29.632,-19.277 ; R22.1@30.352,-3.58 ccw(c30.042,-3.27) 30.48,-3.27 ccw(c30.918,-3.27) R22.1@30.608,-3.58 ; R22.1@30.48,-3.746 v1(30.48,-2.794) ; C14.2@32.942,-12.168 ccw(c32.632,-12.478) 32.632,-12.04 ccw(c32.632,-11.602) C14.2@32.942,-11.911 ; C14.2@33.198,-12.168 cw(c33.508,-12.478) 33.508,-12.04 cw(c33.508,-11.602) C14.2@33.198,-11.911 ; L1.2@36.449,-1.981 38.283,-1.981 38.471,-2.169 ; L1.2@36.637,-2.169 37.338,-2.169 ; 37.272,-2.804 37.338,-2.738 37.338,-2.169 ; 38.17,-2.169 cw(c38.17,-0.26) 36.82,-1.61 ccw(c37.716,-0.714) 37.716,-1.981 ccw(c37.716,-3.249) L1.2@36.82,-2.352 ; 38.276,-2.169 cw(c38.276,-3.308) C5.2@39.164,-2.595 ; 38.364,-2.062 ccw(c38.903,-1.524) C5.2@39.039,-2.273 ; C5.2@38.608,-2.296 R10.2@38.608,-0.572 ; C5.2@38.814,-2.877 ccw(c37.338,-4.061) 37.338,-2.169 ; C6.2@38.841,-5.771 cw(c38.201,-6.411) 39.106,-6.411 cw(c40.011,-6.411) C6.2@39.371,-5.771 ; C6.2@38.841,-4.917 ccw(c38.201,-4.277) 39.106,-4.277 ccw(c40.011,-4.277) C6.2@39.371,-4.917 ; C5.2@38.841,-3.231 cw(c38.201,-3.871) 39.106,-3.871 cw(c40.011,-3.871) C5.2@39.371,-3.231 ; C7.2@39.148,-7.041 cw(c38.773,-7.416) C7.2@39.303,-7.416 ; C7.2@39.522,-7.416 39.218,-7.112 39.106,-7 C6.2@39.106,-5.344 C5.2@39.106,-2.804 C5.2@38.608,-2.306 ; L1.2@36.82,-2.352 cw(c37.263,-2.795) 37.263,-2.169 ; L1.2@36.82,-2.352 cw(c37.263,-2.795) 37.263,-2.169 ; L1.2@36.82,-2.352 cw(c37.263,-2.795) 37.263,-2.169 ; 37.338,-2.169 cw(c37.338,-1.783) 36.961,-1.867 ccw(c37.338,-1.783) 37.338,-2.169 ; 37.338,-2.169 38.471,-2.169 ; 38.471,-2.169 C5.2@38.608,-2.306 ; C5.2@38.58,-2.278 cw(c38.217,-2.642) C5.2@38.731,-2.642 ; C5.2@38.58,-2.278 cw(c38.217,-2.642) C5.2@38.731,-2.642 ; C5.2@38.58,-2.278 cw(c38.217,-2.642) C5.2@38.731,-2.642 ; C5.2@38.608,-2.306 R10.2@38.608,-0.572 ; 38.608,-1.048 ccw(c38.17,-1.048) 38.48,-0.738 cw(c38.17,-1.048) 38.608,-1.048 ; 38.608,-1.048 cw(c39.046,-1.048) 38.736,-0.738 ccw(c39.046,-1.048) 38.608,-1.048 ; R10.2@38.608,-0.572 ccw(c41.125,-0.572) 39.368,-2.373 cw(c41.125,-0.572) R10.2@38.608,-0.572 ; C5.2@38.552,-2.25 ccw(c38.783,-2.019) 38.933,-2.309 cw(c38.783,-2.019) C5.2@38.552,-2.25 ; 38.608,-1.639 ccw(c40.084,-1.639) 39.054,-2.696 cw(c40.084,-1.639) 38.608,-1.639
  Top Layer w0.65: C17.2@18.846,-12.04 v1(20.676,-12.04) ; v1(19.66,-18.796) 19.66,-12.04 ; D1.1@19.82,-44.466 20.32,-43.966 J1.1@20.32,-41.91 ; D1.1@19.826,-44.272 ccw(c18.632,-43.078) 20.32,-43.078 ; J1.1@19.993,-42.237 cw(c19.204,-43.026) 20.32,-43.026 cw(c21.436,-43.026) J1.1@20.647,-42.237 ; C8.2@27.382,-29.616 36.068,-29.616 36.576,-30.124 ; C14.2@33.07,-12.04 36.576,-12.04 ; 35.814,-29.616 36.576,-28.854 ; L1.2@36.123,-1.919 cw(c36.597,-3.1) 37.496,-2.2 ; L1.2@36.365,-2.522 cw(c36.995,-4.094) 38.193,-2.897 ; L1.2@36.449,-1.981 37.277,-1.981 ; v1(36.576,-32.004) v1(36.576,-27.686) ; L1.2@36.75,-3.032 cw(c37.299,-3.581) 37.299,-2.804 ; L1.2@36.75,-2.431 ccw(c37.651,-1.529) 37.651,-2.804 ; L1.2@36.757,-3.025 cw(c37.272,-3.516) 37.272,-2.804 ; L1.2@36.794,-2.229 cw(c37.277,-2.576) 37.277,-1.981 ; L1.2@36.794,-1.733 ccw(c37.277,-1.387) 37.277,-1.981 ; L1.2@36.825,-2.534 ccw(c37.272,-2.3) 37.272,-2.804 ; 38.283,-1.981 C5.2@38.866,-2.564 ; 38.364,-2.062 ccw(c39.1,-1.326) C5.2@39.105,-2.367 ; C6.2@38.912,-5.7 cw(c37.437,-7.175) C7.2@39.522,-7.175 ; C5.2@38.912,-2.998 ccw(c38.442,-3.468) 38.442,-2.804 ccw(c38.442,-2.14) C5.2@38.912,-2.61 ; C6.2@39.106,-5.344 39.522,-5.76 C7.2@39.522,-7.416 ; C5.2@39.106,-2.804 38.1,-2.804 ; 37.272,-2.804 38.1,-2.804 ; 37.277,-1.981 38.1,-2.804
  Bottom Layer w0.4: J1.1@19.905,-42.325 cw(c18.902,-43.328) 20.32,-43.328 cw(c21.738,-43.328) J1.1@20.735,-42.325 ; J1.1@20.32,-41.91 20.32,-43.434 20.742,-43.856 ; v1@20.574,-12.04 v1(20.676,-12.04) v1(33.782,-12.04) ; v1@20.782,-12.146 cw(c21.038,-12.402) 21.038,-12.04 cw(c21.038,-11.677) v1@20.782,-11.934 ; v1@27.584,-6.502 ccw(c27.328,-6.246) 27.69,-6.246 ccw(c28.052,-6.246) v1@27.796,-6.502 ; v1(27.69,-6.608) 27.69,-3.298 28.194,-2.794 v1(30.48,-2.794) ; v1@30.374,-2.9 ccw(c30.118,-3.156) 30.118,-2.794 ccw(c30.118,-2.432) v1@30.374,-2.688 ; v1(30.922,-21.082) 35.814,-21.082 36.068,-21.082 36.576,-21.082 ; v1@31.028,-21.188 cw(c31.284,-21.444) 31.284,-21.082 cw(c31.284,-20.72) v1@31.028,-20.976 ; v1@33.676,-12.146 ccw(c33.42,-12.402) 33.42,-12.04 ccw(c33.42,-11.677) v1@33.676,-11.934 ; v1@36.108,-16.47 cw(c34.977,-17.601) 36.576,-17.601 ; v1@36.391,-16.187 cw(c35.943,-16.635) v1@36.576,-16.635 ; v1@36.47,-27.58 ccw(c36.214,-27.324) 36.576,-27.324 ccw(c36.938,-27.324) v1@36.682,-27.58 ; v1@36.47,-16.567 cw(c36.214,-16.823) 36.576,-16.823 cw(c36.938,-16.823) v1@36.682,-16.567 ; v1(36.576,-27.686) 36.576,-21.844 36.576,-21.082 ; v1(36.576,-16.461) 36.576,-20.574 36.576,-21.082 ; v1@36.576,-16.364 ccw(c36.214,-16.364) 36.47,-16.108 cw(c36.214,-16.364) v1@36.576,-16.364 ; v1@36.576,-16.364 cw(c36.938,-16.364) 36.682,-16.108 ccw(c36.938,-16.364) v1@36.576,-16.364
  Bottom Layer w0.65: v1(14.605,-20.447) 17.209,-20.447 ; v1(17.374,-22.708) 17.374,-19.24 17.818,-18.796 v1(19.66,-18.796) ; v1@20.574,-12.04 v1(33.782,-12.04) ; 20.742,-43.856 27.686,-43.856 28.194,-43.348 28.194,-41.656 28.956,-40.894 35.56,-40.894 36.576,-39.878 v1(36.576,-32.004) ; v1(30.922,-21.082) 36.068,-21.082 ; 35.306,-21.082 36.214,-20.174 v1(36.214,-16.364) ; 35.814,-21.082 36.576,-21.844 ; v1@36.196,-16.382 cw(c35.279,-17.299) 36.576,-17.299 ; 36.214,-17.396 cw(c37.511,-17.396) v1@36.594,-16.479 ; 36.214,-16.937 cw(c37.511,-16.937) v1@36.594,-16.02 ; v1@36.311,-16.461 v1(36.214,-16.364) ; 36.336,-20.814 36.068,-21.082 ; v1(36.576,-27.686) v1(36.576,-16.002) ; 36.576,-20.574 36.068,-21.082 ; v1(36.576,-16.461) v1(36.576,-16.002) ; v1(36.214,-16.364) v1(36.576,-16.002)
+12V: C2.1 C3.2 C19.1 C20.2 J2.1 J2.2 J3.11 J3.12 J5.1 J5.2 J6.6 R8.1 U1.2 U5.9 U32.8 | length 284.5
  Top Layer w0.4: -4.826,4.425 -4.244,5.006 -4.025,5.226 -3.41,5.226 J2.2@-2.586,5.226 ; J2.2@-2.983,4.829 ccw(c-3.943,3.869) -3.943,5.226 ccw(c-3.943,6.583) J2.2@-2.983,5.623 ; C2.1@30.393,3.914 ccw(c30.988,4.509) 30.988,3.668 ; C2.1@30.53,3.845 cw(c30.53,3.255) 30.947,3.672 ; C2.1@30.53,4.089 30.951,3.668 U1.2@32.766,3.668 ; C2.1@30.676,4.197 ccw(c31.954,5.475) 31.954,3.668 ; C2.1@30.736,4.051 ccw(c31.143,4.051) C2.1@30.855,3.764 ; J5.1@39.497,-12.493 J5.2@41.529,-12.493 ; J5.1@39.78,-12.776 cw(c40.463,-13.459) 40.463,-12.493 cw(c40.463,-11.527) J5.1@39.78,-12.21 ; J5.2@41.246,-12.776 ccw(c40.563,-13.459) 40.563,-12.493 ccw(c40.563,-11.527) J5.2@41.246,-12.21
  Top Layer w0.45: U5.9@0.762,-31.496 2.286,-31.496 2.55,-31.232 C19.1@2.55,-29.454 ; C19.1@2.285,-29.881 cw(c1.645,-30.521) 2.55,-30.521 cw(c3.455,-30.521) C19.1@2.815,-29.881 ; C3.2@27.919,4.593 ccw(c27.408,5.104) 28.13,5.104 ; R8.1@28.002,5.968 cw(c27.693,5.658) 28.13,5.658 cw(c28.568,5.658) R8.1@28.259,5.968 ; C3.2@28.13,4.381 R8.1@28.13,6.096 ; 28.13,5.362 ccw(c29.218,5.362) C3.2@28.449,4.593 ; C3.2@28.423,4.089 C2.1@30.53,4.089 ; C3.2@28.611,4.593 ccw(c29.827,5.809) 29.827,4.089 ; C2.1@30.402,3.961 ccw(c30.092,3.651) 30.092,4.089 ccw(c30.092,4.527) C2.1@30.402,4.218
  Top Layer w0.65: -4.739,3.897 cw(c-2.586,1.745) J2.2@-2.586,4.789 ; -4.244,5.006 -3.63,5.006 ; -4.171,5.006 ccw(c-4.171,6.811) J2.2@-2.895,5.535 ; -4.042,4.594 cw(c-3.235,3.788) J2.2@-2.766,4.828 ; -3.446,5.3 cw(c-2.578,5.225) -2.578,6.096 ; -3.41,5.226 -3.63,5.006 ; -3.376,5.26 cw(c-2.821,4.705) J2.2@-2.498,5.42 ; J2.2@-2.918,4.942 ccw(c-4.318,3.748) -4.318,5.588 ; J2.2@-2.798,5.244 cw(c-1.87,5.165) -1.87,6.096 ; J2.2@-2.586,5.439 ccw(c-2.586,3.964) -3.629,5.007 ; J2.2@-2.517,5.657 ccw(c-2.268,7.202) -1.162,6.096 ; J2.2@-2.242,5.496 ccw(c-1.236,6.286) -1.236,5.006 ; J2.2@-2.151,5.189 cw(c-1.162,5.104) -1.162,6.096 ; -1.089,6.169 -1.162,6.096 ; -1.032,5.21 cw(c-0.339,4.517) J2.1@0.035,5.423 ; -1.016,5.226 -1.236,5.006 ; -0.939,5.303 cw(c-0.372,4.735) J2.1@0.072,5.403 ; 0.612,-13.056 cw(c0.612,-14.371) U32.8@1.543,-13.441 ; v1(1.524,-27.686) 2.55,-28.712 C19.1@2.55,-29.454 ; v1@1.528,-15.236 U32.8@1.528,-13.455 ; U32.8@1.528,-14.326 U32.8@1.528,-13.455 ; U32.8@1.548,-13.454 ccw(c1.129,-13.476) 1.129,-13.056 ; C3.2@27.99,4.522 ccw(c27.52,4.992) 28.184,4.992 ccw(c28.848,4.992) C3.2@28.378,4.522 ; R8.1@28.13,6.096 28.184,6.042 C3.2@28.184,4.328 C3.2@28.423,4.089 ; -4.826,3.81 -4.826,-8.434 C20.2@-0.204,-13.056 1.129,-13.056 ; -4.826,3.81 -4.826,4.425 -4.826,5.08 -4.318,5.588 ; -4.826,3.81 -3.63,5.006 ; -4.318,5.588 -3.81,6.096 -1.162,6.096 ; -4.318,5.588 -2.948,5.588 J2.2@-2.586,5.226 -2.032,5.226 -1.162,6.096 ; -3.63,5.006 ccw(c-3.63,5.727) -2.98,5.415 cw(c-3.63,5.727) -3.63,5.006 ; -3.63,5.006 -1.236,5.006 ; 1.129,-13.056 U32.8@1.528,-13.455
  Top Layer w0.8: J3.12@13.607,-0.149 J3.11@13.607,1.851
  Top Layer w1: J2.2@-2.032,5.226 -1.016,5.226 ; -1.162,6.096 -0.4,6.858 0.616,6.858 ; J2.1@0.206,5.296 cw(c1.747,5.727) 0.616,6.858 ; C3.2@28.13,4.381 C3.2@28.184,4.328 26.914,4.328 v1(24.384,6.858) v1(23.622,6.858) v1(14.986,6.858) v1(14.224,6.858) v1(13.716,6.858) 1.586,6.858 ; -1.016,5.226 J2.1@-0.046,5.226 1.586,6.858 ; -1.016,5.226 0.616,6.858 ; 0.616,6.858 1.586,6.858
  Bottom Layer w0.65: v1(1.524,-27.686) v1(1.524,-15.24) ; J3.11@13.607,1.851 14.224,2.468 14.224,6.096 ; v1@13.607,6.749 v1(13.716,6.858) v1(14.224,6.858) ; v1@13.704,6.836 cw(c13.196,5.942) 14.224,5.942 ; 23.99,7.687 ccw(c24.82,6.858) 23.647,6.858 cw(c24.934,6.858) 24.024,7.768 ; v1(24.384,6.858) 25.654,8.128 24.892,8.128 ; 24.384,8.128 23.622,7.366 23.622,7.319 ; v1@24.409,6.859 cw(c26.065,6.955) 24.892,8.128 ; 42.371,-12.493 43.688,-11.176 43.688,-8.636 ; 42.418,8.128 43.688,6.858 43.688,-8.636 ; 42.926,-12.493 42.926,-12.446 44.45,-10.922 ; 44.45,-8.382 43.688,-9.144 43.688,-8.636 ; 44.45,6.35 44.45,6.858 44.45,7.62 ; 44.704,6.477 44.704,7.366 44.45,7.62 ; 14.224,6.096 v1(14.224,6.858) ; 14.224,6.096 v1(14.986,6.858) v1(14.224,6.858) ; 23.622,7.319 v1(23.622,6.858) 24.892,8.128 ; 23.622,7.319 24.892,8.589 43.481,8.589 44.45,7.62
  Bottom Layer w0.8: J3.11@13.607,1.851 v1@13.607,6.749
  Bottom Layer w1: J6.6@-4.318,-43.053 1.143,-43.053 2.55,-41.646 2.55,-28.712 v1(1.524,-27.686) ; v1(23.622,6.858) v1(24.384,6.858) ; 25.654,8.128 42.418,8.128 43.18,8.128 44.45,6.858 44.45,-8.382 44.45,-11.684 43.641,-12.493 42.926,-12.493 42.371,-12.493 J5.1@39.497,-12.493